# EAGLE board Layout da PCB (EAGLE 9.7.0)
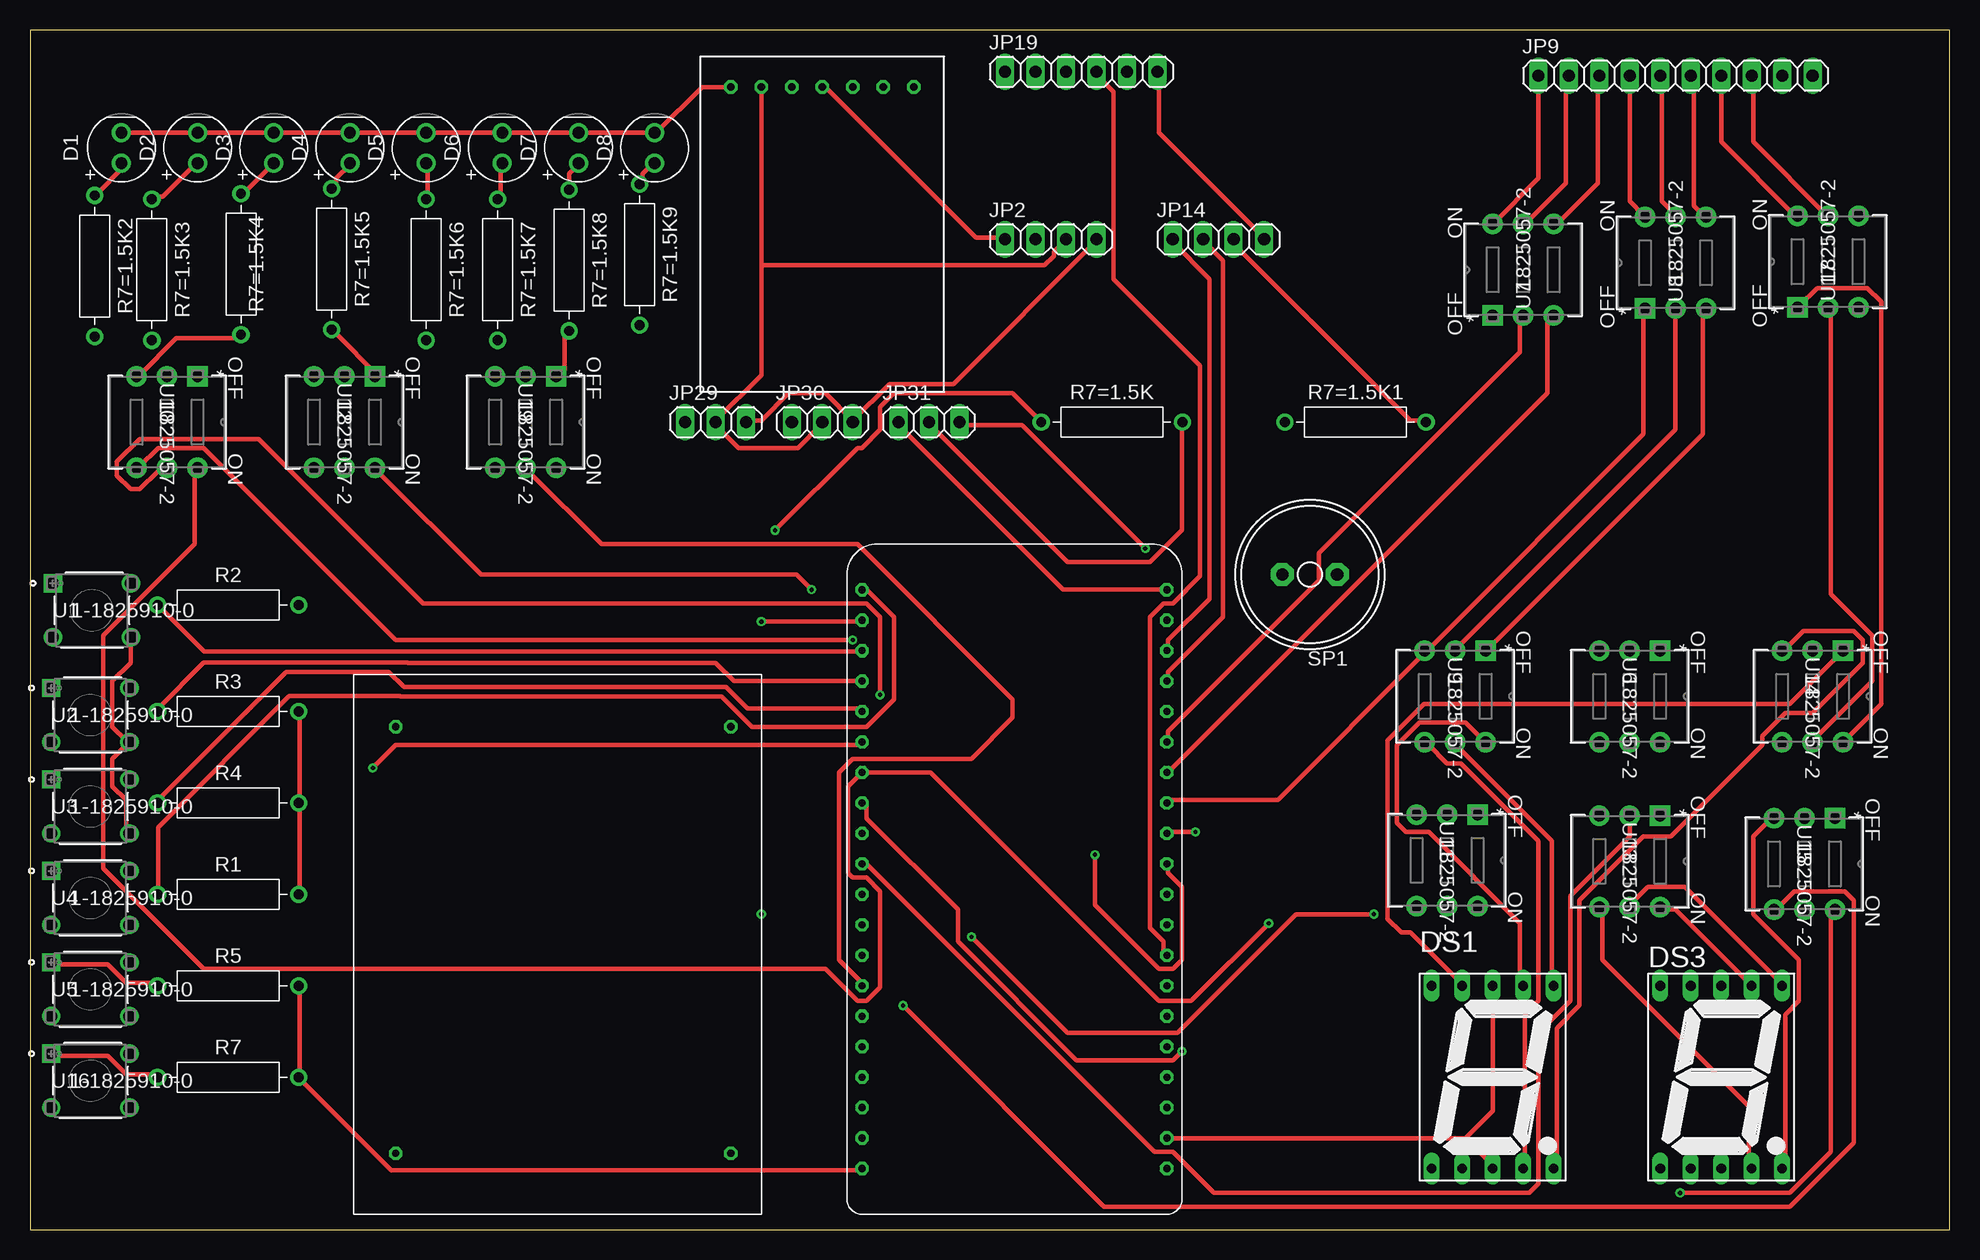
[diagram p0: board, top side]
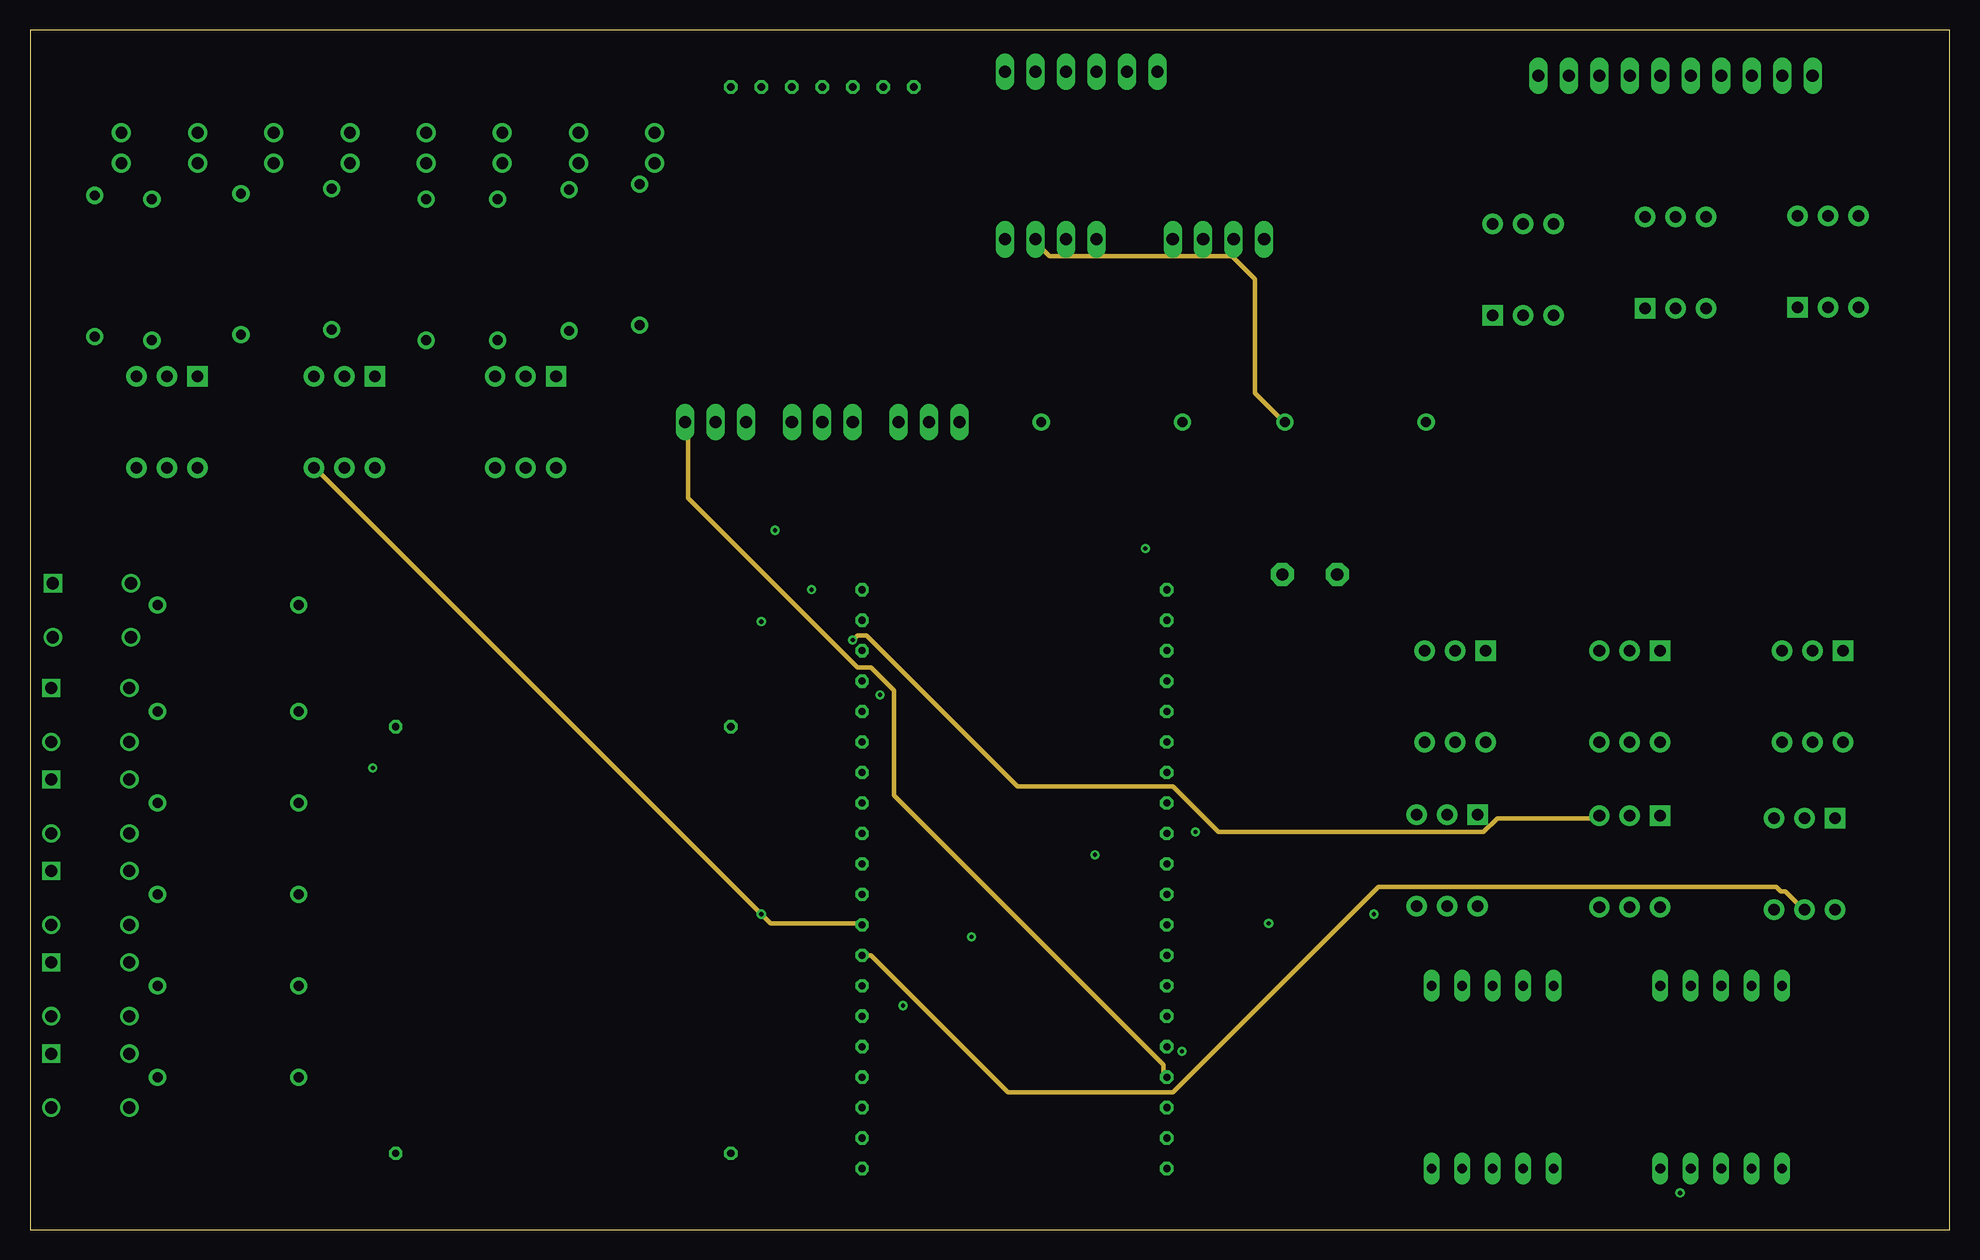
[diagram p1: board, inner layer Route2]
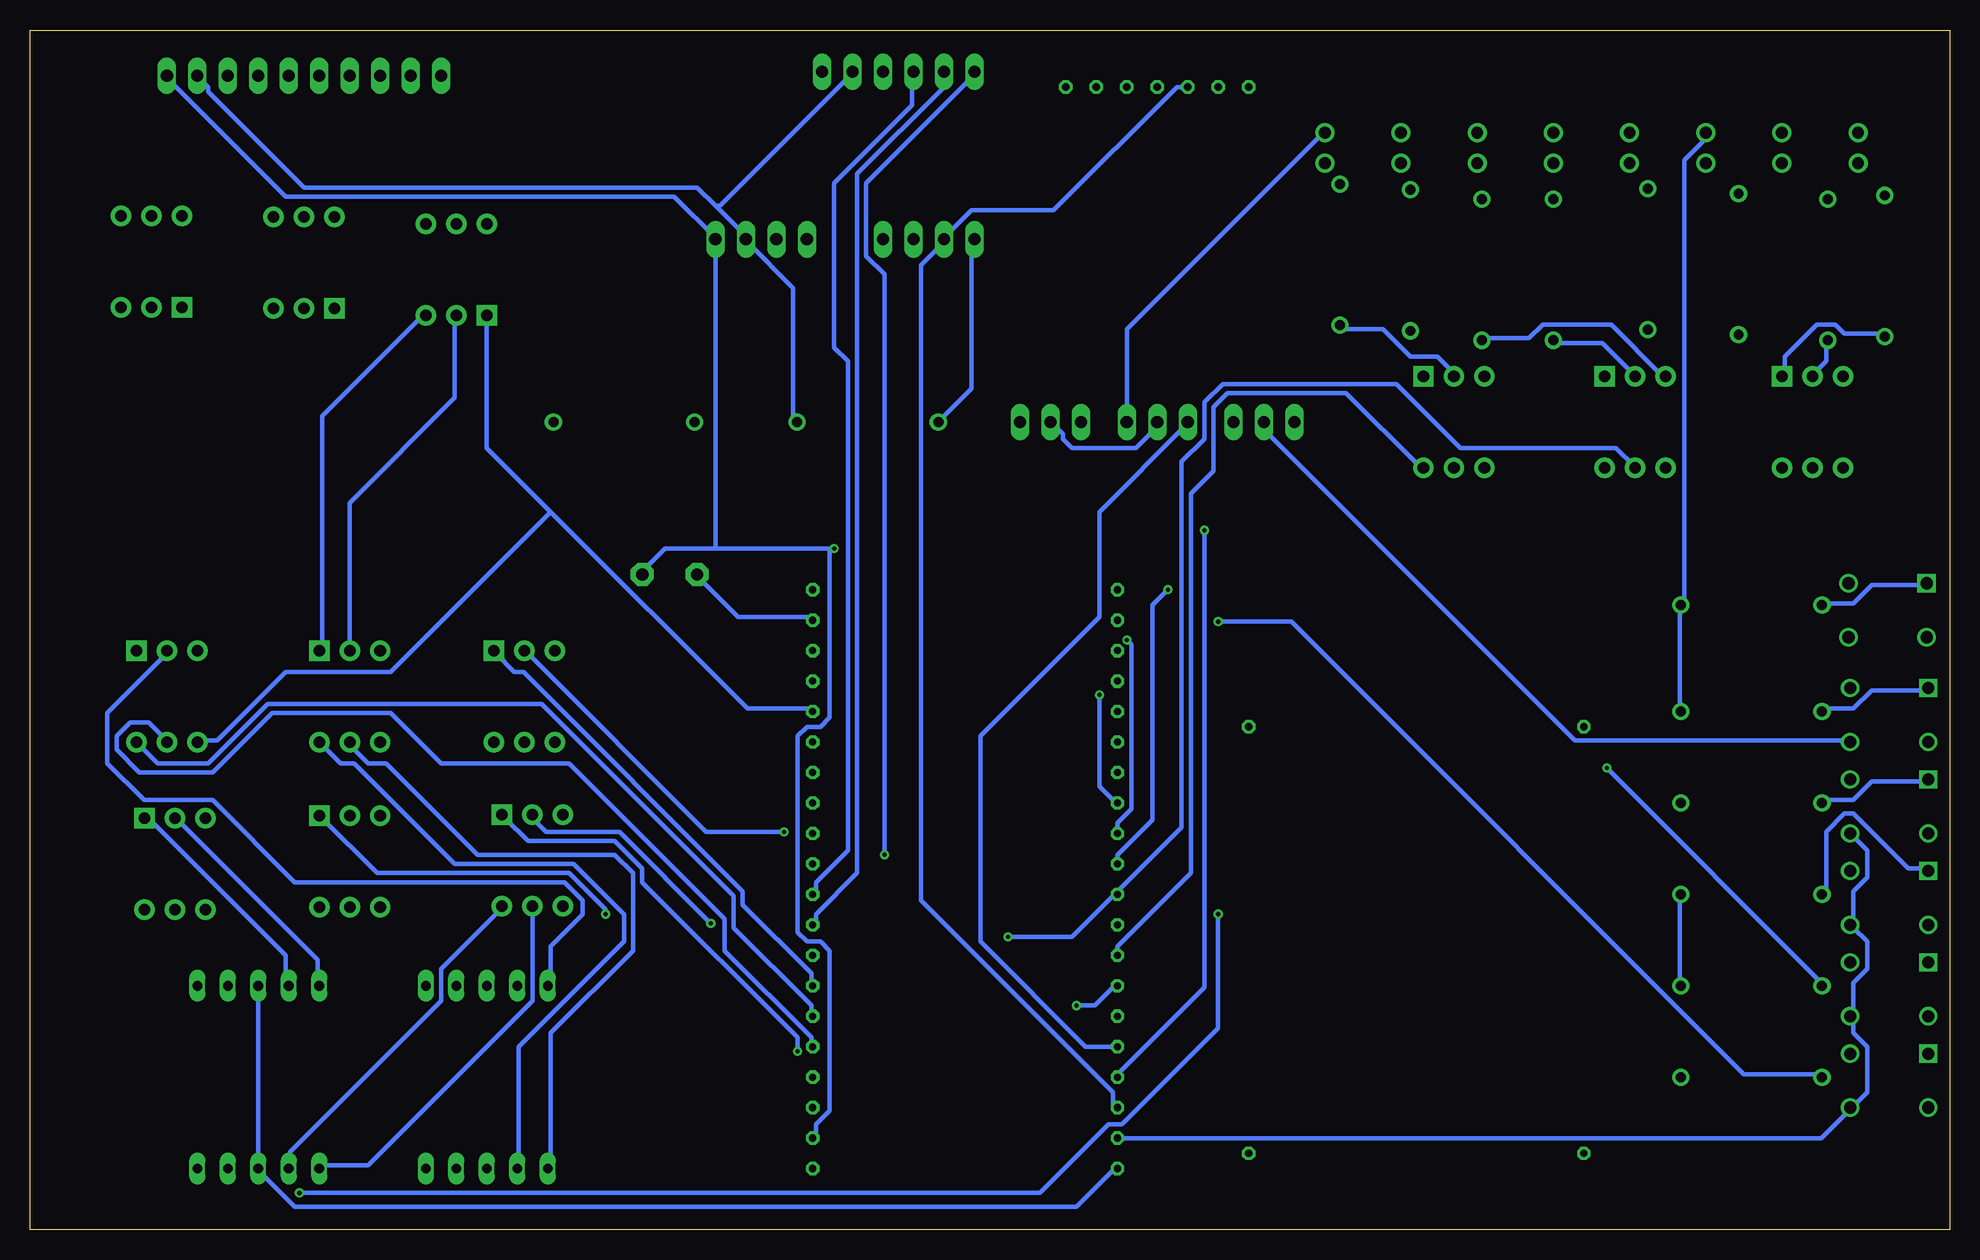
[diagram p2: board, bottom side, seen from below]

Size 160 x 100 mm. Coordinates in mm from the lower left corner, seen from the top.
Outline: 0,0 160,0 160,100 0,100 0,0
Copper layers (1+2*15+16): Top / Route2 / Route15 / Bottom
Stack-up Default Layer Stack: Top User Defined 0.035mm / Dielectric-2 User Defined 1.5mm / Route2 CuFoil:007 0.035mm / Dielectric-1 User Defined 1.5mm / Route15 CuFoil:007 0.035mm / Dielectric-3 User Defined 1.5mm / Bottom User Defined 0.035mm
Design rules "default *": minimum track width 15mil, minimum drill 0.35mm, track to track 15mil, track to pad 15mil, pad to pad 6mil, via to via 6mil, smd to smd 6mil, copper to edge 50mil, drill to drill 6mil, minimum pad ring 10mil, minimum via ring 8mil, stop-mask expansion 4mil, vias tented up to drill 0mil, thermal gap 10mil

## Footprints (pad centres in the part's own frame; a part is rotated, then mirrored left to right if it is on the bottom)
LEDRD254W60D565H860B_W_V1 = drill 0.981 pad 1.581: 1 -1.27,0; 2 1.27,0
7SEG-13 = drill 0.813 long: 1 -5.08,-7.62; 2 -2.54,-7.62; 3 0,-7.62; 4 2.54,-7.62; 5 5.08,-7.62; 6 5.08,7.62; 7 2.54,7.62; 8 0,7.62; 9 -2.54,7.62; 10 -5.08,7.62
1X04 = drill 1.016 long: 1 -3.81,0; 2 -1.27,0; 3 1.27,0; 4 3.81,0
1X10 = drill 1.016 long: 1 -11.43,0; 2 -8.89,0; 3 -6.35,0; 4 -3.81,0; 5 -1.27,0; 6 1.27,0; 7 3.81,0; 8 6.35,0; 9 8.89,0; 10 11.43,0
1X06 = drill 1.016 long: 1 -6.35,0; 2 -3.81,0; 3 -1.27,0; 4 1.27,0; 5 3.81,0; 6 6.35,0
1X03 = drill 1.016 long: 1 -2.54,0; 2 0,0; 3 2.54,0
RESAD1176W63L850D250B = drill 0.83 pad 1.43: 1 -5.88,0; 2 5.88,0
AL11P = drill 1.016 pad 1.905 octagon: + 2.286,0; - -2.286,0
SWITCH_1-1825910-0 = drill 1.016 pad 1.524 square: 1 -6.502,4.496 | drill 1.016 pad 1.524: 2 -6.502,0; 3 0,0; 4 0,4.496
SWDIP6_300X138P100 = drill 0.965 pad 1.702 square: 1 -7.62,5.08 | drill 0.965 pad 1.702: 2 -7.62,2.54; 3 -7.62,0; 4 0,0; 5 0,2.54; 6 0,5.08
FRANZININHO_WIFI = drill 0.6 octagon: 0 0,48.26; 1 0,45.72; 2 0,43.18; 3 0,40.64; 3V3 0,2.54; 4 0,38.1; 5 0,35.56; 5V 25.4,5.08; 6 0,33.02; 7 0,30.48; 8 0,7.62; 9 0,5.08; 10 0,27.94; 11 0,25.4; 12 0,22.86; 13 0,20.32; 14 0,17.78; 15 0,15.24; 16 0,12.7; 17 0,10.16; 18 25.4,7.62; 21 25.4,10.16; 26 25.4,12.7; 33 25.4,15.24; 34 25.4,17.78; 35 25.4,20.32; 36 25.4,22.86; 37 25.4,25.4; 38 25.4,27.94; 39 25.4,30.48; 40 25.4,33.02; 41 25.4,35.56; 42 25.4,38.1; 43 25.4,40.64; 44 25.4,43.18; 45 25.4,45.72; 46 25.4,48.26; GND0 0,0; GND1 25.4,2.54; GND2 25.4,0
PERIMETRO_DISPLAY_TFT = drill 0.6 octagon: BLK 15.24,0; DC 12.7,0; GND 0,0; RES 10.16,0; SCL 5.08,0; SDA 7.62,0; VCC 2.54,0
PROTOBOARD_170_PINOS = drill 0.6 octagon: P1 5.08,30.48; P2 5.08,2.54; P3 40.64,30.48; P4 40.64,2.54

## Placement (x,y rotation side)
D1  [LEDRD254W60D565H860B_W_V1]  7.62,90.17 90 top
D2  [LEDRD254W60D565H860B_W_V1]  13.97,90.17 90 top
D3  [LEDRD254W60D565H860B_W_V1]  20.32,90.17 90 top
D4  [LEDRD254W60D565H860B_W_V1]  26.67,90.17 90 top
D5  [LEDRD254W60D565H860B_W_V1]  33.02,90.17 90 top
D6  [LEDRD254W60D565H860B_W_V1]  39.37,90.17 90 top
D7  [LEDRD254W60D565H860B_W_V1]  45.72,90.17 90 top
D8  [LEDRD254W60D565H860B_W_V1]  52.07,90.17 90 top
DS1  7SEG-CK  [7SEG-13]  121.92,12.7 0 top
DS3  7SEG-CK  [7SEG-13]  140.97,12.7 0 top
JP2  PINHD-1X4  [1X04]  85.09,82.55 0 top
JP9  PINHD-1X10  [1X10]  137.16,96.19 0 top
JP14  PINHD-1X4  [1X04]  99.06,82.55 0 top
JP19  PINHD-1X6  [1X06]  87.63,96.52 0 top
JP29  PINHD-1X3  [1X03]  57.15,67.31 0 top
JP30  PINHD-1X3  [1X03]  66.04,67.31 0 top
JP31  PINHD-1X3  [1X03]  74.93,67.31 0 top
R1  [RESAD1176W63L850D250B]  16.51,27.94 0 top
R2  [RESAD1176W63L850D250B]  16.51,52.07 0 top
R3  [RESAD1176W63L850D250B]  16.51,43.18 0 top
R4  [RESAD1176W63L850D250B]  16.51,35.56 0 top
R5  [RESAD1176W63L850D250B]  16.51,20.32 0 top
R7  [RESAD1176W63L850D250B]  16.51,12.7 0 top
R7=1.5K  [RESAD1176W63L850D250B]  90.17,67.31 0 top
R7=1.5K1  [RESAD1176W63L850D250B]  110.49,67.31 0 top
R7=1.5K2  [RESAD1176W63L850D250B]  5.4,80.33 270 top
R7=1.5K3  [RESAD1176W63L850D250B]  10.16,80.01 270 top
R7=1.5K4  [RESAD1176W63L850D250B]  17.58,80.48 270 top
R7=1.5K5  [RESAD1176W63L850D250B]  25.15,80.9 270 top
R7=1.5K6  [RESAD1176W63L850D250B]  33.02,80.01 270 top
R7=1.5K7  [RESAD1176W63L850D250B]  38.98,80.01 270 top
R7=1.5K8  [RESAD1176W63L850D250B]  44.93,80.8 270 top
R7=1.5K9  [RESAD1176W63L850D250B]  50.8,81.28 270 top
SP1  AL11P  [AL11P]  106.68,54.61 180 top
U1  1-1825910-0  [SWITCH_1-1825910-0]  8.41,49.38 0 top
U2  1-1825910-0  [SWITCH_1-1825910-0]  8.28,40.65 0 top
U3  1-1825910-0  [SWITCH_1-1825910-0]  8.28,33.02 0 top
U4  1-1825910-0  [SWITCH_1-1825910-0]  8.28,25.4 0 top
U5  1-1825910-0  [SWITCH_1-1825910-0]  8.28,17.78 0 top
U6  1825057-2  [SWDIP6_300X138P100]  130.81,40.64 270 top
U7  1825057-2  [SWDIP6_300X138P100]  127,83.82 90 top
U8  1825057-2  [SWDIP6_300X138P100]  139.7,84.4 90 top
U9  1825057-2  [SWDIP6_300X138P100]  116.26,40.64 270 top
U10  1825057-2  [SWDIP6_300X138P100]  8.89,63.5 270 top
U11  1825057-2  [SWDIP6_300X138P100]  115.57,26.97 270 top
U12  1825057-2  [SWDIP6_300X138P100]  23.68,63.5 270 top
U13  1825057-2  [SWDIP6_300X138P100]  130.81,26.89 270 top
U14  1825057-2  [SWDIP6_300X138P100]  146.05,40.64 270 top
U15  1825057-2  [SWDIP6_300X138P100]  145.36,26.67 270 top
U16  1-1825910-0  [SWITCH_1-1825910-0]  8.28,10.16 0 top
U17  1825057-2  [SWDIP6_300X138P100]  152.4,84.49 90 top
U19  1825057-2  [SWDIP6_300X138P100]  38.77,63.5 270 top
U$1  FRANZINO_WIFI  [FRANZININHO_WIFI]  69.36,5.08 0 top
U$2  DISPLAY_TFT_SPI  [PERIMETRO_DISPLAY_TFT]  58.42,95.25 0 top
U$3  PROTOBOARD_170_PINOS  [PROTOBOARD_170_PINOS]  60.96,1.27 90 top

## Library data of the parts
D1-D8 = Lib_Opto_Eletronic_Led_Verde
DS1 DS3 = Opto-Electronic; CATEGORY: Opto-Electronic; SUB-CATEGORY: Display; TYPE: 7-Segment
JP2 JP9 JP14 JP19 JP29-JP31 = Connector; CATEGORY: CONNECTOR; SUB-CATEGORY: PIN-HEADER
R1-R5 R7 R7=1.5K R7=1.5K1-R7=1.5K9 = Resistor; CATEGORY: Resistor; SUB-CATEGORY: Fixed
SP1 = buzzer; OC_FARNELL: unknown; OC_NEWARK: unknown
U1-U5 U16 = Switches; BUILT_BY: EMA_UL_Team; CATEGORY: Tactile Switches; COPYRIGHT: Copyright (C) 2016 Accelerated Designs. All rights reserved; DESCRIPTION: FSM6JH=6MM TACT SWITCH, HIGH TEMP; MANUFACTURER_PART_NUMBER: 1-1825910-0; PART_STATUS: active; SERIES: Unknown; VENDOR: TE Connectivity
U6-U15 U17 U19 = Switches; BUILT_BY: EMA_UL_Team; CATEGORY: DIP & SIP Switches; COPYRIGHT: Copyright (C) 2016 Accelerated Designs. All rights reserved; DESCRIPTION: ADE0304=DIP SWITCH,EXT,THRU/HL; MANUFACTURER_PART_NUMBER: 1825057-2; PART_STATUS: active; SERIES: Alcoswitch DIP,Alcoswitch DIP ADE; VENDOR: TE Connectivity
U$1 = biblioteca franzininho wifi
U$2 = biblioteca display tft
U$3 = biblioteca protoboard 170 pinos

## Nets
N$1: SP1.+ U$1.45
N$2: U6.2 U7.2 U$1.41
N$3: U15.4 U19.5 U$1.15
N$4: JP19.3 U$1.36
N$5: JP14.1 U$1.44
N$6: JP19.1 U$1.37
N$7: U7.1 U14.4 U$1.42
N$8: R1.1 U4.1 U$1.0
N$9: JP2.3 JP9.9 JP14.3 JP19.5 JP29.2 JP30.2 JP31.2 R7=1.5K1.2 R7=1.5K.2 U1.3 U2.3 U3.3 U4.3 U5.3 U16.3 U$1.3V3 U$2.VCC
N$10: R7.1 U16.1 U$1.1
N$11: R2.1 U1.1 U$1.2
N$12: JP14.2 U$1.43
N$13: JP19.2 U$1.35
N$14: DS1.2 U6.6
N$15: JP2.1 R7=1.5K.1 U$1.8 U$2.SDA
N$16: JP19.4 U$1.34
N$17: DS1.1 U6.5
N$18: JP31.1 U$1.46
N$20: R3.1 U2.1 U$1.3
N$21: U8.3 U9.1 U$1.33
N$22: JP29.1 U$1.18
N$23: U6.1 U7.3 U$1.40
N$24: JP9.2 U7.5
N$26: U8.1 U9.3 U$1.39
N$32: D1.1 R7=1.5K2.1
N$33: D2.1 R7=1.5K3.1
N$34: D3.1 R7=1.5K4.1
N$35: D4.1 R7=1.5K5.1
N$36: D5.1 R7=1.5K6.1
N$37: D6.1 R7=1.5K7.1
N$38: D7.1 R7=1.5K8.1
N$39: D8.1 R7=1.5K9.1
N$40: R7=1.5K2.2 U10.1
N$42: JP9.1 U7.6
N$43: JP9.3 U7.4
N$44: JP9.4 U8.6
N$45: R7=1.5K7.2 U12.3
N$46: R7=1.5K8.2 U19.1
N$47: JP9.5 U8.5
N$51: U14.6 U17.1 U$1.26
N$52: U14.5 U17.2 U$1.21
N$53: DS1.9 U14.1
N$54: DS1.7 U9.6
N$55: DS1.4 U9.4
N$56: R4.1 U3.1 U$1.4
N$57: U8.2 U9.2 U$1.38
N$62: R5.1 U5.1 U$1.5
N$63: D1.2 D2.2 D3.2 D4.2 D5.2 D6.2 D7.2 D8.2 DS3.3 DS3.8 JP2.4 JP29.3 JP30.3 R1.2 R2.2 R3.2 R4.2 R5.2 R7.2 U$1.GND0 U$2.GND
N$64: DS1.10 U14.2
N$65: JP30.1 U$1.17
N$66: DS1.6 U9.5
N$67: DS1.5 U14.3
N$68: DS1.3 DS1.8 JP9.10 JP14.4 JP19.6 JP31.3 SP1.- U$1.GND1
N$69: DS3.2 U11.6
N$70: DS3.1 U11.5
N$71: JP2.2 R7=1.5K1.1 U$1.9 U$2.SCL
N$72: R7=1.5K3.2 U10.2
N$74: R7=1.5K4.2 U10.3
N$75: R7=1.5K5.2 U12.1
N$76: R7=1.5K6.2 U12.2
N$78: U10.5 U11.1 U$1.7
N$80: R7=1.5K9.2 U19.2
N$82: U12.6 U13.2 U$1.11
N$83: U12.5 U13.1 U$1.12
N$84: U12.4 U15.6 U$1.13
N$85: U15.5 U19.6 U$1.14
N$87: U10.4 U13.3 U$1.10
N$88: JP9.6 U8.4
N$89: JP9.7 U17.6
N$90: JP9.8 U17.5
N$91: U10.6 U11.2 U$1.6
N$94: DS3.6 U13.5
N$95: DS3.7 U13.6
N$96: DS3.4 U13.4
N$97: DS3.9 U15.1
N$98: DS3.10 U15.2
N$99: DS3.5 U15.3

## Tracks (layer width: path | path; a pad name or v marks a point on that pad's centre or on a via)
N$1
  Bottom 0.381: U$1.45 94.87,51.05 100.97,51.05 104.39,54.48 SP1.+
N$2
  Top 0.381: U$1.41 94.87,40.77 94.87,41.53 107.44,54.1 107.44,56.39 124.21,73.15 124.21,76.2 U7.2
  Bottom 0.381: U6.2 133.35,60.58 124.59,69.34 124.59,76.2 U7.2
N$3  (via drill 0.35)
  Top 0.381: U$1.15 69.34,20.57 67.44,22.48 67.44,38.1 68.58,39.24 78.49,39.24 81.92,42.67 81.92,44.2 68.96,57.15 47.62,57.15 41.53,63.25 U19.5 | v72.77,18.67 89.53,1.91 146.69,1.91 152.02,7.24 152.02,27.43 151.26,28.19 147.07,28.19 145.54,26.67 U15.4
  Bottom 0.381: v72.77,18.67 71.25,18.67 69.72,20.19 U$1.15
N$4
  Bottom 0.381: U$1.36 94.49,28.19 94.49,28.96 91.82,31.62 91.82,72.39 92.96,73.53 92.96,87.25 86.49,93.73 86.49,96.39 JP19.3
N$5
  Top 0.381: U$1.44 94.87,48.39 94.87,49.15 98.3,52.58 98.3,79.25 95.25,82.3 JP14.1
N$6  (via drill 0.35)
  Top 0.381: v88.77,31.24 88.77,27.05 94.11,21.72 95.25,21.72 96.01,22.48 96.01,28.57 94.87,29.72 94.87,30.48 U$1.37
  Bottom 0.381: v88.77,31.24 88.77,79.63 90.3,81.15 90.3,87.25 81.15,96.39 JP19.1
N$7
  Bottom 0.381: 116.59,59.82 121.92,65.15 U7.1 | 116.59,59.82 100.2,43.43 94.87,43.43 U$1.42 | 116.59,59.82 129.92,46.48 138.68,46.48 144.4,40.77 145.92,40.77 U14.4
N$8
  Top 0.381: U$1.0 69.72,53.34 72.01,51.05 72.01,44.2 69.72,41.91 60.2,41.91 57.66,44.45 30.87,44.45 30.85,44.47 21.61,44.47 10.67,33.53 10.67,28.19 R1.1
  Bottom 0.381: U4.1 1.91,30.1 3.43,30.1 8,34.67 8.76,34.67 10.29,33.15 10.29,28.19 R1.1
N$9
  Top 0.381: U3.3 8,33.15 8,35.81 6.86,36.96 6.86,39.24 8,40.39 U2.3 8,40.77 6.86,41.91 6.86,45.72 8.38,47.24 8.38,49.15 U1.3 | 60.96,80.39 60.96,71.25 57.15,67.44 JP29.2 57.15,67.06 59.05,65.15 64.01,65.15 65.91,67.06 JP30.2 | 60.96,80.39 U$2.VCC | JP2.3 85.34,81.53 85.34,81.15 84.58,80.39 60.96,80.39 | R7=1.5K1.2 116.2,67.44 115.06,67.44 100.2,82.3 JP14.3 | JP31.2 75.06,67.06 86.49,55.63 93.34,55.63 96.01,58.29 96.01,67.06 R7=1.5K.2
  Bottom 0.381: U3.3 8,32.77 6.86,31.62 6.86,29.34 8,28.19 8,25.53 U4.3 8,25.15 6.86,24 6.86,21.72 8,20.57 8,17.91 U5.3 8,17.53 8,16.38 6.86,15.24 6.86,11.43 8,10.29 U16.3 8.38,9.91 10.67,7.62 U$1.3V3 | JP31.2 73.91,66.29 73.91,65.91 73.15,65.15 67.82,65.15 65.91,67.06 JP30.2 | R7=1.5K.2 96.39,67.44 96.39,78.49 100.2,82.3 JP14.3 100.2,82.68 102.87,85.34 | 102.87,85.34 104.39,86.87 137.16,86.87 145.16,94.87 145.16,95.25 145.92,96.01 JP9.9 | 102.87,85.34 102.49,85.34 91.44,96.39 JP19.5 | JP29.2 57.15,66.67 31.24,40.77 8.38,40.77 U2.3
N$10  (via drill 0.35)
  Top 0.381: v60.96,50.67 69.34,50.67 U$1.1 | U16.1 1.91,14.48 6.48,14.48 8,12.95 10.29,12.95 R7.1
  Bottom 0.381: v60.96,50.67 54.86,50.67 17.14,12.95 10.67,12.95 R7.1
N$11
  Top 0.381: R2.1 14.5,48.2 69.3,48.2 U$1.2
  Bottom 0.381: U1.1 2.29,53.72 6.48,53.72 8,52.2 10.29,52.2 R2.1
N$12
  Top 0.381: U$1.43 94.87,45.72 94.87,46.48 99.44,51.05 99.44,80.77 97.92,82.3 JP14.2
N$13
  Bottom 0.381: JP19.2 83.82,95.25 91.06,88.01 91.06,29.72 94.49,26.29 94.49,25.53 U$1.35
N$14
  Bottom 0.381: U6.6 134.11,38.86 132.97,38.86 124.59,30.48 114.68,30.48 110.49,26.29 110.49,24 119.25,15.24 119.25,5.33 DS1.2
N$15  (via drill 0.35)
  Top 0.381: U$2.SDA 66.29,95.25 78.87,82.68 81.15,82.68 JP2.1 | v62.1,58.29 68.96,65.15 69.34,65.15 70.87,66.67 70.87,68.58 72.01,69.72 81.92,69.72 84.2,67.44 R7=1.5K.1
  Bottom 0.381: v62.1,58.29 62.1,20.19 69.34,12.95 U$1.8 | JP2.1 81.53,82.3 81.53,70.1 84.2,67.44 R7=1.5K.1
N$16
  Top 0.381: U$1.34 94.49,22.86 94.49,24 93.34,25.15 93.34,51.05 94.49,52.2 95.25,52.2 97.54,54.48 97.54,72.01 90.3,79.25 90.3,94.87 88.77,96.39 JP19.4
N$17
  Bottom 0.381: DS1.1 116.59,5.33 116.59,16.38 109.73,23.24 109.73,29.72 111.25,31.24 122.68,31.24 130.3,38.86 131.83,38.86 133.35,40.39 U6.5
N$18
  Top 0.381: U$1.46 86.11,53.34 72.39,67.06 JP31.1
N$20
  Top 0.381: U$1.3 58.67,45.72 57.15,47.24 31.5,47.24 31.48,47.26 14.49,47.26 10.67,43.43 R3.1
  Bottom 0.381: U2.1 1.91,44.96 6.48,44.96 8,43.43 10.29,43.43 R3.1
N$21
  Top 0.381: U8.3 139.45,76.58 139.45,66.29 121.54,48.39 U9.1
  Bottom 0.381: U$1.33 94.87,20.57 94.87,21.34 100.58,27.05 100.58,28.19 118.87,46.48 119.63,46.48 121.16,48.01 U9.1
N$22
  Route2 0.381: U$1.18 94.49,12.95 94.49,13.72 72.01,36.2 72.01,44.96 70.1,46.86 68.96,46.86 54.86,60.96 54.86,67.06 JP29.1
N$23
  Top 0.381: U$1.40 94.87,38.1 126.49,69.72 126.49,75.82 126.87,76.2 U7.3
  Bottom 0.381: U6.1 135.64,48.39 135.64,67.82 127.25,76.2 U7.3
N$24
  Top 0.381: JP9.2 128.02,96.01 128.02,87.25 124.59,83.82 U7.5
N$26
  Top 0.381: U$1.39 94.87,35.81 104.01,35.81 116.2,48.01 U9.3 116.59,48.39 134.49,66.29 134.49,76.58 U8.1
N$32
  Top 0.381: D1.1 7.62,88.39 5.71,86.49 R7=1.5K2.1
N$33
  Top 0.381: R7=1.5K3.1 10.29,86.11 11.05,86.11 13.72,88.77 D2.1
N$34
  Top 0.381: D3.1 17.91,86.49 R7=1.5K4.1
N$35
  Top 0.381: R7=1.5K5.1 25.53,86.87 25.53,87.63 26.67,88.77 D4.1
N$36
  Top 0.381: R7=1.5K6.1 33.15,86.11 33.15,88.77 D5.1
N$37
  Top 0.381: R7=1.5K7.1 39.24,86.11 39.24,88.77 D6.1
N$38
  Top 0.381: R7=1.5K8.1 44.96,86.87 44.96,88.01 45.72,88.77 D7.1
N$39
  Top 0.381: R7=1.5K9.1 51.05,87.25 51.05,88.01 51.82,88.77 D8.1
N$40
  Bottom 0.381: R7=1.5K2.2 5.71,74.68 8.76,74.68 9.53,75.44 11.05,75.44 13.72,72.77 13.72,71.25 U10.1
N$42
  Top 0.381: JP9.1 125.73,87.63 U7.6
N$43
  Top 0.381: JP9.3 130.68,96.01 130.68,87.25 127.25,83.82 U7.4
N$44
  Top 0.381: JP9.4 133.35,85.72 134.49,84.58 U8.6
N$45
  Bottom 0.381: R7=1.5K7.2 38.86,74.3 35.05,74.3 33.91,75.44 28.19,75.44 24,71.25 U12.3
N$46
  Top 0.381: R7=1.5K8.2 44.58,74.68 44.58,71.63 44.2,71.25 U19.1
N$47
  Top 0.381: JP9.5 136.02,96.01 136.02,85.72 137.16,84.58 U8.5
N$51
  Top 0.381: U14.6 154.31,43.81 154.31,77.34 153.16,78.49 148.97,78.49 147.45,76.96 U17.1
  Bottom 0.381: U14.6 149.35,38.86 145.16,38.86 140.21,43.81 117.35,43.81 101.35,27.81 101.35,25.15 94.87,18.67 94.87,17.91 U$1.26
N$52
  Top 0.381: U17.2 150.11,76.58 150.11,52.96 153.54,49.53 153.54,45.72 148.59,40.77 U14.5
  Bottom 0.381: U$1.21 94.87,15.24 94.87,16 102.11,23.24 102.11,25.91 115.06,38.86 125.73,38.86 129.92,43.05 139.83,43.05 144.78,38.1 150.88,38.1 152.78,40.01 152.78,41.15 151.64,42.29 150.11,42.29 148.59,40.77 U14.5
N$53
  Top 0.381: U14.1 146.69,43.81 116.2,43.81 113.16,40.77 113.16,25.91 114.3,24.77 115.06,24.77 119.25,20.57 DS1.9
N$54
  Top 0.381: DS1.7 124.21,20.57 124.21,25.53 116.59,33.15 114.68,33.15 113.92,33.91 113.92,40.39 115.82,42.29 119.63,42.29 121.16,40.77 U9.6
N$55
  Top 0.381: DS1.4 124.59,5.33 124.59,17.91 125.73,19.05 125.73,32.38 119.25,38.86 118.11,38.86 116.59,40.39 U9.4
N$56
  Top 0.381: U$1.4 69.34,43.43 59.82,43.43 58.04,45.21 31.18,45.21 29.9,46.5 21.35,46.5 10.67,35.81 R4.1
  Bottom 0.381: U3.1 1.91,37.34 6.48,37.34 8,35.81 10.29,35.81 R4.1
N$57  (via drill 0.35)
  Top 0.381: v97.16,33.15 94.87,33.15 U$1.38 | U8.2 137.16,66.67 118.87,48.39 U9.2
  Bottom 0.381: v97.16,33.15 103.63,33.15 118.49,48.01 U9.2
N$62  (via drill 0.35)
  Top 0.381: v28.57,38.48 30.48,40.39 69.34,40.39 U$1.5 | U5.1 1.91,22.1 6.48,22.1 8,20.57 10.29,20.57 R5.1
  Bottom 0.381: v28.57,38.48 10.67,20.57 R5.1
N$63
  Top 0.381: 68.58,67.44 66.29,69.72 63.25,69.72 60.96,67.44 59.82,67.44 JP29.3 | 68.58,67.44 71.63,70.48 76.96,70.48 88.77,82.3 JP2.4 | 68.58,67.44 JP30.3 | D1.2 D2.2 D3.2 D4.2 D5.2 D6.2 D7.2 D8.2 52.2,91.44 56.01,95.25 U$2.GND | U$1.GND0 69.34,4.95 30.1,4.95 22.48,12.57 R7.2 22.48,12.95 22.48,20.19 R5.2 | R1.2 22.48,28.19 22.48,35.43 R4.2 22.48,35.81 22.48,43.05 R3.2
  Bottom 0.381: JP30.3 68.58,75.06 52.2,91.44 D8.2 | DS3.8 DS3.3 140.97,4.95 137.92,1.91 72.77,1.91 69.72,4.95 U$1.GND0 | R1.2 22.48,27.81 22.48,20.57 R5.2 | R3.2 22.48,43.43 22.48,51.82 R2.2 22.1,52.2 22.1,89.15 20.57,90.68 20.57,91.44 D3.2
N$64
  Bottom 0.381: DS1.10 116.59,20.57 116.59,23.62 113.92,26.29 113.92,27.43 115.44,28.96 137.92,28.96 144.78,35.81 150.5,35.81 153.54,38.86 153.54,43.05 148.59,48.01 U14.2
N$65
  Bottom 0.381: U$1.17 72.01,15.24 80.77,24 80.77,41.15 70.87,51.05 70.87,59.82 63.63,67.06 JP30.1
N$66
  Top 0.381: DS1.6 126.87,20.57 126.87,32.38 118.87,40.39 U9.5
N$67
  Top 0.381: DS1.5 127.25,5.33 127.25,16.76 129.16,18.67 129.16,27.43 134.49,32.77 136.78,32.77 144.4,40.39 144.4,41.15 146.3,43.05 148.59,43.05 152.78,47.24 152.78,49.15 152.02,49.91 147.83,49.91 146.3,48.39 U14.3
N$68  (via drill 0.35)
  Top 0.381: JP19.6 94.11,96.39 94.11,91.44 102.87,82.68 JP14.4 | 119.63,7.62 U$1.GND1 | 119.63,7.62 121.92,5.33 DS1.3 | DS1.8 121.92,9.91 119.63,7.62 | v92.96,56.77 82.68,67.06 77.72,67.06 JP31.3
  Bottom 0.381: JP9.10 148.59,96.01 138.68,86.11 106.3,86.11 102.87,82.68 JP14.4 102.87,56.77 | 102.87,56.77 107.06,56.77 108.97,54.86 SP1.- | 102.87,56.77 93.34,56.77 | 93.34,56.77 v92.96,56.77 | 93.34,56.77 93.34,42.67 94.11,41.91 95.25,41.91 96.01,41.15 96.01,24.77 95.25,24 94.11,24 93.34,23.24 93.34,9.91 94.49,8.76 94.49,7.62 U$1.GND1
N$69
  Bottom 0.381: DS3.2 138.3,5.33 138.3,6.48 125.73,19.05 125.73,21.72 120.78,26.67 U11.6
N$70
  Bottom 0.381: U11.5 118.11,19.05 131.83,5.33 135.64,5.33 DS3.1
N$71
  Route2 0.381: R7=1.5K1.1 104.39,67.44 102.11,69.72 102.11,79.25 100.2,81.15 84.96,81.15 83.82,82.3 JP2.2
  Bottom 0.381: U$2.SCL 64.39,95.25 74.68,84.96 81.53,84.96 83.82,82.68 JP2.2 83.82,82.3 85.72,80.39 85.72,27.43 69.72,11.43 69.72,10.29 U$1.9
N$72
  Bottom 0.381: R7=1.5K3.2 10.29,73.91 10.29,72.39 11.43,71.25 U10.2
N$74
  Top 0.381: R7=1.5K4.2 17.53,74.3 12.19,74.3 9.14,71.25 U10.3
N$75
  Top 0.381: R7=1.5K5.2 25.53,74.68 28.96,71.25 U12.1
N$76
  Bottom 0.381: R7=1.5K6.2 32.77,73.91 28.96,73.91 26.29,71.25 U12.2
N$78  (via drill 0.35)
  Top 0.381: v96.01,14.86 95.25,14.1 87.25,14.1 77.34,24 77.34,26.67 69.72,34.29 69.72,35.43 U$1.7 | v70.87,44.58 70.87,51.05 69.72,52.2 32.77,52.2 19.05,65.91 9.14,65.91 7.24,64.01 7.24,62.87 8.38,61.72 9.14,61.72 10.67,63.25 11.43,63.25 U10.5
  Bottom 0.381: v96.01,14.86 96.01,16 108.97,28.96 108.97,30.1 111.25,32.38 118.49,32.38 120.4,34.29 U11.1 | v70.87,44.58 70.87,36.96 69.72,35.81 U$1.7
N$80
  Bottom 0.381: R7=1.5K9.2 50.67,75.06 47.24,75.06 44.96,72.77 42.67,72.77 41.15,71.25 U19.2
N$82  (via drill 0.35)
  Top 0.381: v65.15,53.34 63.88,54.61 37.59,54.61 28.96,63.25 U12.6 | U13.2 133.35,32.77 128.4,27.81 128.4,19.05 125.73,16.38 125.73,3.81 124.97,3.05 98.68,3.05 95.25,6.48 93.73,6.48 69.72,30.48 U$1.11
  Bottom 0.381: v65.15,53.34 66.42,52.07 66.42,34.16 69.34,31.24 69.34,30.48 U$1.11
N$83  (via drill 0.35)
  Top 0.381: v112.01,26.29 105.54,26.29 95.63,16.38 86.49,16.38 v78.49,24.38
  Bottom 0.381: U12.5 26.29,63.63 27.81,65.15 40.77,65.15 46.1,70.48 60.58,70.48 62.1,68.96 62.1,65.91 64.01,64.01 64.01,33.53 69.34,28.19 U$1.12 69.72,27.81 73.15,24.38 v78.49,24.38 | v112.01,26.29 112.01,26.67 115.06,29.72 131.06,29.72 135.64,34.29 U13.1
N$84  (via drill 0.35)
  Top 0.381: v137.54,3.05 146.69,3.05 150.11,6.48 150.11,26.67 U15.6
  Route2 0.381: U$1.13 69.34,25.53 61.72,25.53 v60.96,26.29 24,63.25 U12.4
  Bottom 0.381: v137.54,3.05 75.82,3.05 70.1,8.76 68.96,8.76 60.96,16.76 v60.96,26.29
N$85
  Route2 0.381: U$1.14 70.1,22.86 81.53,11.43 95.25,11.43 112.39,28.57 145.54,28.57 145.92,28.19 146.3,28.19 147.83,26.67 U15.5
  Bottom 0.381: U$1.14 69.34,22.86 69.34,23.62 63.25,29.72 63.25,61.34 61.34,63.25 61.34,68.58 60.2,69.72 50.29,69.72 44.2,63.63 U19.6
N$87  (via drill 0.35)
  Top 0.381: v68.58,49.15 30.48,49.15 14.48,65.15 10.67,65.15 9.14,63.63 U10.4
  Route2 0.381: v68.58,49.15 68.96,49.53 69.72,49.53 82.3,36.96 95.25,36.96 99.06,33.15 121.16,33.15 122.3,34.29 130.68,34.29 U13.3
  Bottom 0.381: v68.58,49.15 68.2,48.77 68.2,35.05 69.34,33.91 69.34,33.15 U$1.10
N$88
  Top 0.381: JP9.6 138.68,96.01 138.68,85.34 139.45,84.58 U8.4
N$89
  Top 0.381: JP9.7 140.97,90.68 147.07,84.58 U17.6
N$90
  Top 0.381: JP9.8 143.64,96.01 143.64,90.68 149.73,84.58 U17.5
N$91  (via drill 0.35)
  Top 0.381: v103.25,25.53 96.77,19.05 94.11,19.05 75.06,38.1 U$1.6 69.34,38.1 68.2,36.96 68.2,29.72 68.58,29.34 69.72,29.34 70.87,28.19 70.87,20.19 69.72,19.05 68.96,19.05 66.29,21.72 14.48,21.72 6.1,30.1 6.1,49.53 13.72,57.15 13.72,63.25 U10.6
  Bottom 0.381: v103.25,25.53 110.87,33.15 116.97,33.15 118.11,34.29 U11.2
N$94
  Top 0.381: DS3.6 145.92,20.57 137.92,28.57 134.87,28.57 133.35,27.05 U13.5
N$95
  Top 0.381: DS3.7 137.16,26.67 136.02,26.67 U13.6
N$96
  Top 0.381: DS3.4 143.26,5.33 143.26,10.29 131.06,22.48 131.06,26.67 U13.4
N$97
  Bottom 0.381: DS3.9 138.68,20.57 138.68,22.86 150.11,34.29 U15.1
N$98
  Bottom 0.381: DS3.10 136.02,20.57 136.02,22.48 147.83,34.29 U15.2
N$99
  Top 0.381: DS3.5 146.3,5.33 146.3,17.91 147.45,19.05 147.45,22.48 143.64,26.29 143.64,32.77 145.16,34.29 U15.3